# EAGLE board CAN Star (EAGLE 8.7.0)
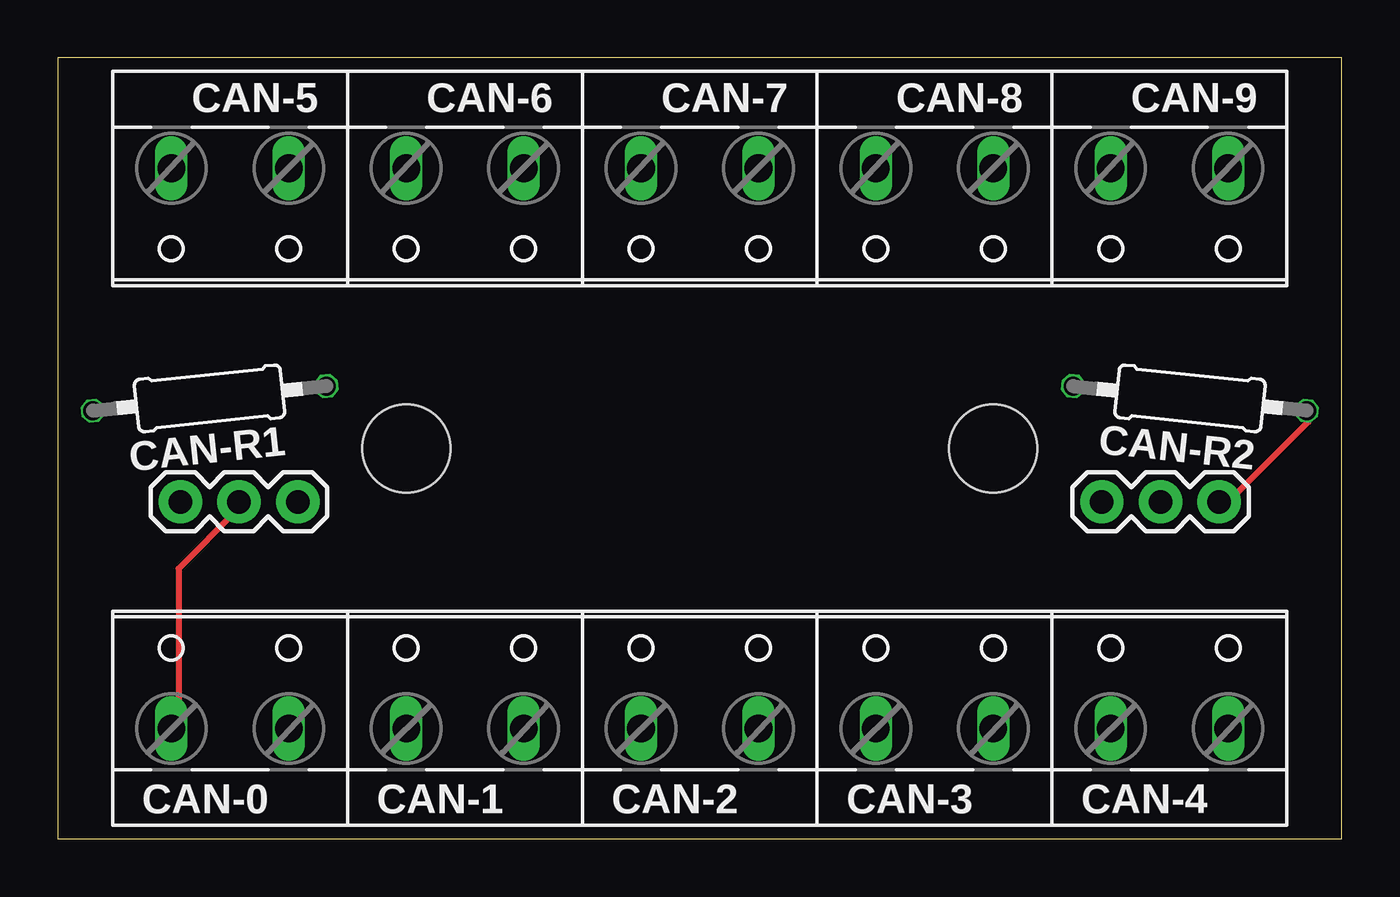
[diagram p0: board, top side]
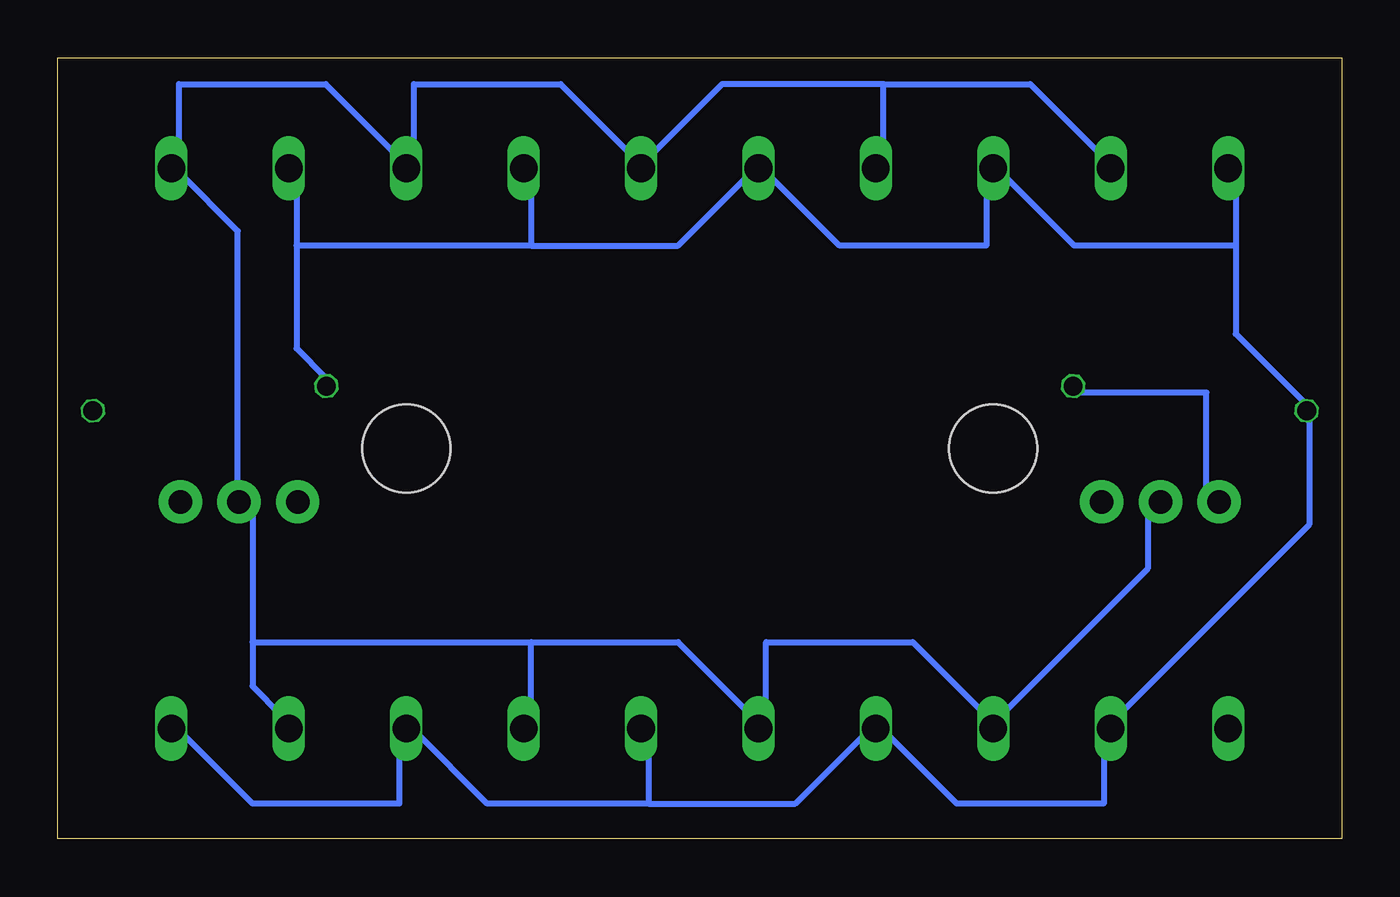
[diagram p1: board, bottom side, seen from below]

Size 55.55 x 33.78 mm. Coordinates in mm from the lower left corner, seen from the top.
Outline: 0,0 55.55,0 55.55,33.78 0,33.78 0,0
Copper layers (1*16): Top 0.0356mm / dielectric 1.5011mm / Bottom 0.0356mm
Design rules "SilverCircuits *": minimum track width 10mil, minimum drill 15mil, track to track 16mil, track to pad 16mil, pad to pad 16mil, via to via 16mil, smd to smd 0mil, copper to edge 20mil, drill to drill 20mil, minimum pad ring 4mil, minimum via ring 8mil, stop-mask expansion 4mil, vias tented up to drill 0mil, thermal gap 10mil
Holes 3.81 mm at 15.08,16.89 40.48,16.89

## Footprints (pad centres in the part's own frame; a part is rotated, then mirrored left to right if it is on the bottom)
W237-132 = drill 1.194 long: 1 -2.54,-0.635; 2 2.54,-0.635
0207/10 = drill 0.813 octagon: 1 -5.08,0; 2 5.08,0
1X03 = drill 1.016 pad 1.88: 1 0,0; 2 2.54,0; 3 5.08,0

## Placement (x,y rotation side)
CAN-0  CAN 0  [W237-132]  7.46,5.41 0 top
CAN-1  CAN 1  [W237-132]  17.62,5.41 0 top
CAN-2  CAN 2  [W237-132]  27.78,5.41 0 top
CAN-3  CAN 3  [W237-132]  37.94,5.41 0 top
CAN-4  CAN 4  [W237-132]  48.1,5.41 0 top
CAN-5  CAN 5  [W237-132]  7.46,28.37 180 top
CAN-6  CAN 6  [W237-132]  17.62,28.37 180 top
CAN-7  CAN 7  [W237-132]  27.78,28.37 180 top
CAN-8  CAN 8  [W237-132]  37.94,28.37 180 top
CAN-9  CAN 9  [W237-132]  48.1,28.37 180 top
CAN-R1  120Ω  [0207/10]  6.57,19.05 186 top
CAN-R2  120Ω  [0207/10]  48.99,19.05 174 top
JUMPER1  [1X03]  5.3,14.58 0 top
JUMPER2  [1X03]  50.25,14.58 180 top

## Library data of the parts
CAN-0 CAN-1-CAN-9 = con-wago-508; OC_FARNELL: unknown; OC_NEWARK: unknown
CAN-R1 CAN-R2 = resistor
JUMPER1 JUMPER2 = SparkFun-Connectors

## Nets
CAN-A: CAN-0.1 CAN-1.1 CAN-2.1 CAN-3.1 CAN-4.1 CAN-5.1 CAN-6.1 CAN-7.1 CAN-8.1 CAN-9.1 JUMPER1.2 JUMPER2.2
CAN-B: CAN-0.2 CAN-1.2 CAN-2.2 CAN-3.2 CAN-4.2 CAN-5.2 CAN-6.2 CAN-7.2 CAN-8.2 CAN-9.2 CAN-R1.2 CAN-R2.2
N$1: CAN-R1.1 JUMPER1.1
N$2: CAN-R2.1 JUMPER2.1

## Tracks (layer width: path | path; a pad name or v marks a point on that pad's centre or on a via)
CAN-A
  Top 0.254: CAN-0.1 5.22,5.33 5.22,11.68 7.76,14.22 JUMPER1.2
  Bottom 0.254: 19.83,32.64 13.48,32.64 10.3,29.46 CAN-5.1 | 19.83,32.64 19.83,29.46 CAN-6.1 | 19.83,32.64 26.81,32.64 29.99,29.46 CAN-7.1 30.62,29.46 33.8,32.64 40.15,32.64 40.15,29.46 CAN-8.1 40.78,29.46 43.96,32.64 50.31,32.64 50.31,29.46 CAN-9.1 50.31,28.83 47.77,26.29 47.77,14.86 JUMPER2.2 47.13,14.22 47.13,8.51 | JUMPER1.2 8.4,14.22 8.4,11.68 14.75,5.33 CAN-1.1 15.38,5.33 18.56,8.51 24.91,8.51 24.91,5.33 CAN-2.1 25.54,5.33 28.72,8.51 35.07,8.51 | 35.07,8.51 35.07,5.33 CAN-3.1 | 47.13,8.51 47.13,6.6 45.86,5.33 CAN-4.1 | 47.13,8.51 35.07,8.51
CAN-B
  Bottom 0.254: 29.99,1.52 23.64,1.52 20.46,4.7 CAN-1.2 19.83,4.7 16.65,1.52 10.3,1.52 10.3,4.7 CAN-0.2 9.67,5.33 1.41,13.59 1.41,18.03 CAN-R1.2 1.41,18.67 4.59,21.84 4.59,25.65 | 29.99,1.52 29.99,4.7 CAN-2.2 | 29.99,1.52 36.97,1.52 40.15,4.7 CAN-3.2 40.78,4.7 40.78,1.52 47.13,1.52 50.31,4.7 CAN-4.2 | 45.23,25.65 45.23,28.83 CAN-9.2 | 45.23,25.65 45.23,21.21 43.96,19.94 CAN-R2.2 | 35.07,25.65 28.72,25.65 25.54,28.83 CAN-7.2 24.91,28.83 21.73,25.65 15.38,25.65 15.38,28.83 CAN-6.2 14.75,28.83 11.57,25.65 4.59,25.65 | 35.07,25.65 35.07,28.83 CAN-8.2 | 35.07,25.65 45.23,25.65 | 4.59,25.65 4.59,28.83 CAN-5.2
N$1
  Bottom 0.254: CAN-R1.1 11.57,19.3 5.86,19.3 5.86,14.86 JUMPER1.1
N$2
  Top 0.254: CAN-R2.1 54.12,18.03 50.31,14.22 JUMPER2.1

## Text on the board
tValues: Y(H) | G(L) | Y(H) | G(L) | Y(H) | G(L) | Y(H) | G(L) | Y(H) | G(L) | RoboLoCo / Team 5338 / goo.gl/W5tM8y | ON | ON | G(L) | Y(H) | G(L) | Y(H) | G(L) | Y(H) | G(L) | Y(H) | G(L) | Y(H)